# EAGLE board GPS (EAGLE 7.2.0)
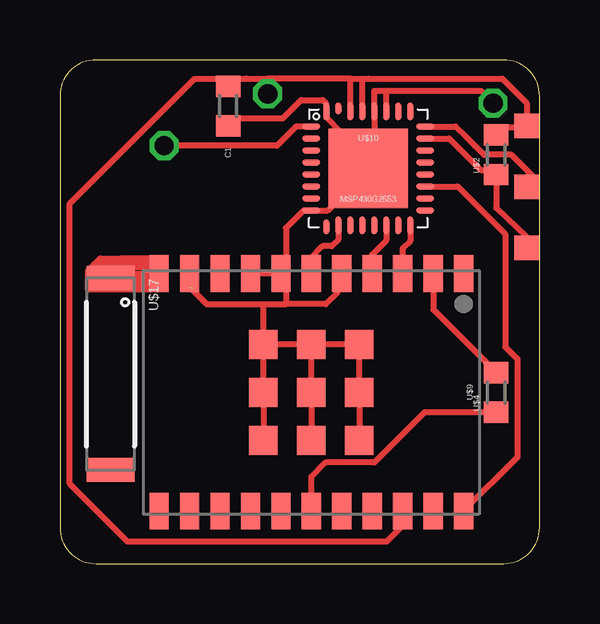
[diagram p0: board, top side]
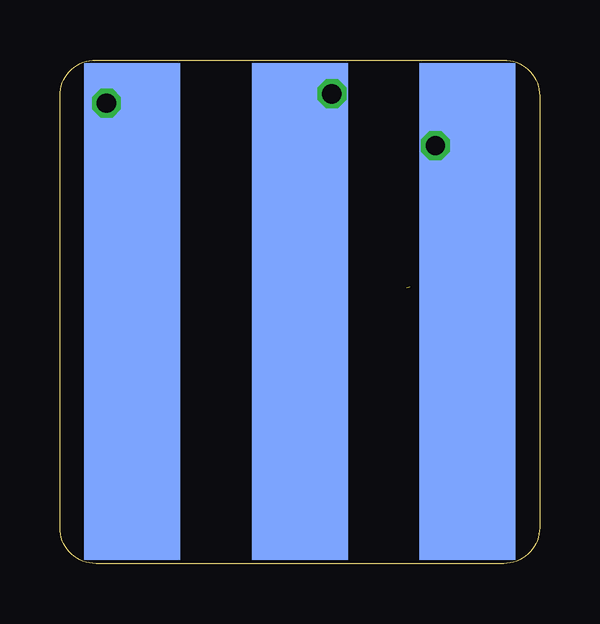
[diagram p1: board, bottom side, seen from below]

Size 20 x 21 mm. Coordinates in mm from the lower left corner, seen from the top.
Copper layers (1*16): Top 0.035mm / dielectric 1.5mm / Bottom 0.035mm
Design rules "Bilex DRU *": minimum track width 10mil, minimum drill 24mil, track to track 10mil, track to pad 10mil, pad to pad 10mil, via to via 10mil, smd to smd 10mil, copper to edge 1mil, drill to drill 8mil, minimum pad ring 10mil, minimum via ring 8mil, stop-mask expansion 4mil, vias tented up to drill 0mil, thermal gap 10mil

## Footprints (pad centres in the part's own frame; a part is rotated, then mirrored left to right if it is on the bottom)
603 = smd 0.889 x 1.016: 1 -0.826,0; 2 0.826,0
CARRIER_SMD2_WIDE_3POL = smd 4 x 20.7 bottom: GND -6.985,3.493; RX/TX 6.985,3.493; VCC 0,3.493 | smd 1.016 x 1.016: RST -9.461,0.826; TST -9.461,-1.714; VCC'' -9.461,-4.255
A2200 = smd 1.524 x 0.8: !RST 4.953,6.35; ANT_GND -4.953,-5.08; ANT_IN -4.953,-6.35; EXTINT 4.953,-5.08; EXTINT2/GPIO8 -4.953,1.27; GND@1 -4.953,-1.27; GND@2 -4.953,-2.54; GPIO2 -4.953,6.35; GPIO3 4.953,-6.35; GPIO6 4.953,0; GPIO7 4.953,1.27; I2C_CLK 4.953,-2.54; I2C_DIO 4.953,-1.27; NC 4.953,5.08; ON_OFF -4.953,0; RX0 -4.953,2.54; TM_GPIO5 4.953,-3.81; TX0 -4.953,3.81; VANT -4.953,-3.81; VCC 4.953,3.81; VOUT -4.953,5.08; WAKEUP 4.953,2.54 | smd 1.2 x 1.2: GND@3 -2,0; GND@4 -2,2; GND@5 0,2; GND@6 2,2; GND@7 0,0; GND@8 2,0; GND@9 -2,-2; GND@10 0,-2; GND@11 2,-2
QFN32 = smd 0.762 x 0.254: 1 -2.375,1.75; 2 -2.375,1.25; 3 -2.375,0.75; 4 -2.375,0.25; 5 -2.375,-0.25; 6 -2.375,-0.75; 7 -2.375,-1.25; 8 -2.375,-1.75; 17 2.375,-1.75; 18 2.375,-1.25; 19 2.375,-0.75; 20 2.375,-0.25; 21 2.375,0.25; 22 2.375,0.75; 23 2.375,1.25; 24 2.375,1.75 | smd 0.254 x 0.635: 9 -1.75,-2.438 | smd 0.254 x 0.762: 10 -1.25,-2.375; 11 -0.75,-2.375; 12 -0.25,-2.375; 13 0.25,-2.375; 14 0.75,-2.375; 15 1.25,-2.375; 16 1.75,-2.375; 25 1.75,2.375; 26 1.25,2.375; 27 0.75,2.375; 28 0.25,2.375; 29 -0.25,2.375; 30 -0.75,2.375; 32 -1.75,2.375 | smd 0.254 x 0.508: 31 -1.25,2.5 | smd 3.302 x 3.302: TP 0,0
ANTENNA-CHIP4 = smd 1 x 2: NC 4,0; SIG -4,0

## Placement (x,y rotation side)
C1  100n  [603]  7.01,19.07 270 top
U$1  CARRIER_SMD2SMD2_3POL_W  [CARRIER_SMD2_WIDE_3POL]  10,14 180 top
U$2  10k  [603]  18.19,17.05 90 top
U$4  10k  [603]  18.19,7.14 90 top
U$9  GPS-A2200  [A2200]  10.48,7.14 270 top
U$10  MSP430G2553  [QFN32]  12.86,16.48 0 top
U$17  ANTENNA2SMD3  [ANTENNA-CHIP4]  2.11,7.9 270 top

## Library data of the parts
C1 U$1 U$2 U$4 U$9 U$10 = thar
U$17 = SparkFun-RF

## Nets
GND: C1.2 U$1.GND U$9.ANT_GND U$9.EXTINT2/GPIO8 U$9.GND@1 U$9.GND@2 U$9.GND@3 U$9.GND@4 U$9.GND@5 U$9.GND@6 U$9.GND@7 U$9.GND@8 U$9.GND@9 U$9.GND@10 U$9.GND@11 U$10.8 U$10.27 U$10.28 U$10.32 U$10.TP
N$2: U$9.TX0 U$10.16
N$3: U$1.TST U$10.24
N$4: U$1.RST U$2.1 U$10.23
N$5: U$9.RX0 U$10.14
N$6: U$9.!RST U$10.19
N$7: U$9.ON_OFF U$10.10
N$12: U$1.RX/TX U$10.1
N$24: U$4.1 U$9.GPIO6
N$25: U$4.2 U$9.VOUT
N$26: U$9.ANT_IN U$17.SIG
VCC: C1.1 U$1.VCC U$1.VCC'' U$2.2 U$9.VCC U$10.29 U$10.30

## Tracks (layer width: path | path; a pad name or v marks a point on that pad's centre or on a via)
GND  (via drill 0.8)  (1 unrouted)
  Top 0.254: 13.38,16.16 12.88,17.19 13.12,17.17 | 13.38,16.16 13.43,16.13 U$10.TP 12.47,16.27 12.35,16.22 12.09,15.64 11.17,14.73 U$10.8 10.16,14.73 9.43,13.99 9.43,12.05 | 13.11,17.55 U$10.28 13.11,19.71 13.5,19.71 | 13.11,17.55 13.11,16.87 13.38,16.16 | 13.11,17.55 12.34,17.81 11.71,18 11.11,18.61 U$10.32 11.11,19.17 10.95,19.33 10.06,19.33 9.3,18.57 7.27,18.57 7.01,18.32 | 6.92,18.35 7.01,18.32 | C1.2 7.01,18.32 | v18.06,19.2 17.55,19.71 13.5,19.71 | U$10.27 13.61,19.69 13.5,19.71 | 9.43,12.05 U$9.GND@1 | U$9.GND@1 U$9.GND@2 | 8.16,9.17 8.48,9.17 | 8.96,9.17 U$9.GND@9 U$9.GND@3 | U$9.GND@3 U$9.GND@4 U$9.GND@5 U$9.GND@6 | U$9.GND@3 U$9.GND@7 U$9.GND@8 | U$9.GND@10 U$9.GND@11 | U$9.EXTINT2/GPIO8 11.59,12.09 11.59,11.33 11.08,10.82 9.43,10.82 | U$9.GND@1 9.43,11.97 | 9.43,12.05 9.43,10.82 | 8.41,7.26 8.48,7.2 U$9.GND@10 | 5.66,11.67 5.53,11.49 5.24,11.45 | U$9.ANT_GND 5.4,11.54 6.12,10.82 8.48,10.82 | 8.48,10.82 9.43,10.82 | 8.96,9.17 8.66,9.17 | 8.66,9.17 8.54,9.04 8.92,9.04 9.04,9.17 8.96,9.17 | U$9.GND@10 8.48,9.17 | 8.48,9.17 8.48,10.82 | 8.66,9.17 8.48,9.17
  Bottom 0.254: U$1.GND 18,18.63 v18.06,19.2
N$2
  Top 0.254: U$10.16 14.61,13.46 14.29,13.15 U$9.TX0
N$3
  Top 0.254: U$1.TST 19.71,16.15 18.82,17.05 17.68,17.05 17.3,17.43 16.92,17.8 16.5,18.23 U$10.24
N$4
  Top 0.254: U$2.1 18.19,14.83 19.46,13.61 19.46,13.48 U$1.RST | 18.06,16.16 17.87,16.28 U$2.1 | U$10.23 16.24,17.73 17.55,16.41 18.26,16.41 U$2.1
N$5
  Top 0.254: U$10.14 13.61,13.47 13.02,12.89 U$9.RX0
N$6
  Top 0.254: U$10.19 16.59,15.73 18.57,13.74 18.57,9.04 19.08,8.53 19.08,4.43 U$9.!RST
N$7
  Top 0.254: U$10.10 11.61,13.51 11.33,13.23 10.95,13.23 10.44,12.72 10.44,12.13 U$9.ON_OFF
N$12  (via drill 0.8)
  Top 0.254: U$10.1 9.85,18.23 9.04,17.42 v4.35,17.42 v4.35,17.43
  Bottom 0.254: U$1.RX/TX 3.01,14.31 v4.35,17.43
N$24
  Top 0.254: U$4.1 15.2,6.31 13.11,4.21 11.08,4.21 10.48,3.62 U$9.GPIO6
N$25
  Top 0.254: U$9.VOUT 15.56,10.59 U$4.2
N$26
  Top 0.254: U$9.ANT_IN 4.39,12.68 4.35,12.72 | 4.35,12.72 2.57,12.72 | 2.57,12.72 2.44,12.6 | 2.44,12.6 2.19,12.34 | 1.93,12.09 1.68,11.84 | 1.55,11.71 1.3,11.45 1.92,11.45 U$17.SIG | 4.35,12.72 4.35,12.6 | 4.35,12.34 4.35,12.09 | 4.35,11.71 4.35,11.45 1.17,11.45 1.17,12.22 1.42,12.47 | 2.44,12.6 4.35,12.6 | 4.35,12.6 4.35,12.34 | 4.35,12.34 2.19,12.34 | 2.19,12.34 1.93,12.09 | 1.93,12.09 4.35,12.09 | 4.35,12.09 4.35,11.84 | 4.35,11.84 1.68,11.84 | 1.68,11.84 1.55,11.71 | 1.55,11.71 4.35,11.71 | 4.35,11.71 4.35,11.84 | 1.42,12.47 1.68,12.72 2.57,12.72 | 1.42,12.47 2.57,12.47
VCC  (via drill 0.8)
  Top 0.254: U$10.30 12.11,20.22 | 12.11,20.22 12.86,20.22 | 12.86,20.22 18.44,20.22 19.46,19.2 U$1.VCC'' | 12.11,20.22 8.67,20.22 | 7.01,20.22 6.95,20.22 C1.1 7.01,20.22 | 7.01,20.22 7.78,20.22 | 7.78,20.22 8.67,20.22 | 8.67,20.22 v8.66,19.59 | U$1.VCC'' 19.65,18.25 19.71,18.32 | U$2.2 18.06,17.93 18.19,18.19 19.27,18.19 U$1.VCC'' | U$10.29 12.61,20.22 12.86,20.22 | U$9.VCC 14.29,1.59 13.62,0.91 2.82,0.91 0.41,3.33 0.41,15.01 5.62,20.22 7.77,20.22 7.78,20.22
  Bottom 0.254: U$1.VCC 10,18.25 v8.66,19.59